# Altium PCB Morpheus_LED.PcbDoc (part 1 of 2)
Units mm, origin at the board's own origin, x right, y up, seen from the top; angles counter-clockwise.
Board outline 53.02 x 53.02 mm, 4 copper layers (Component Side, Ground Plane, Power Plane, Solder Side), stack 0.108 mm thick; 57 components, 33 nets, 170 pads, 69 vias.
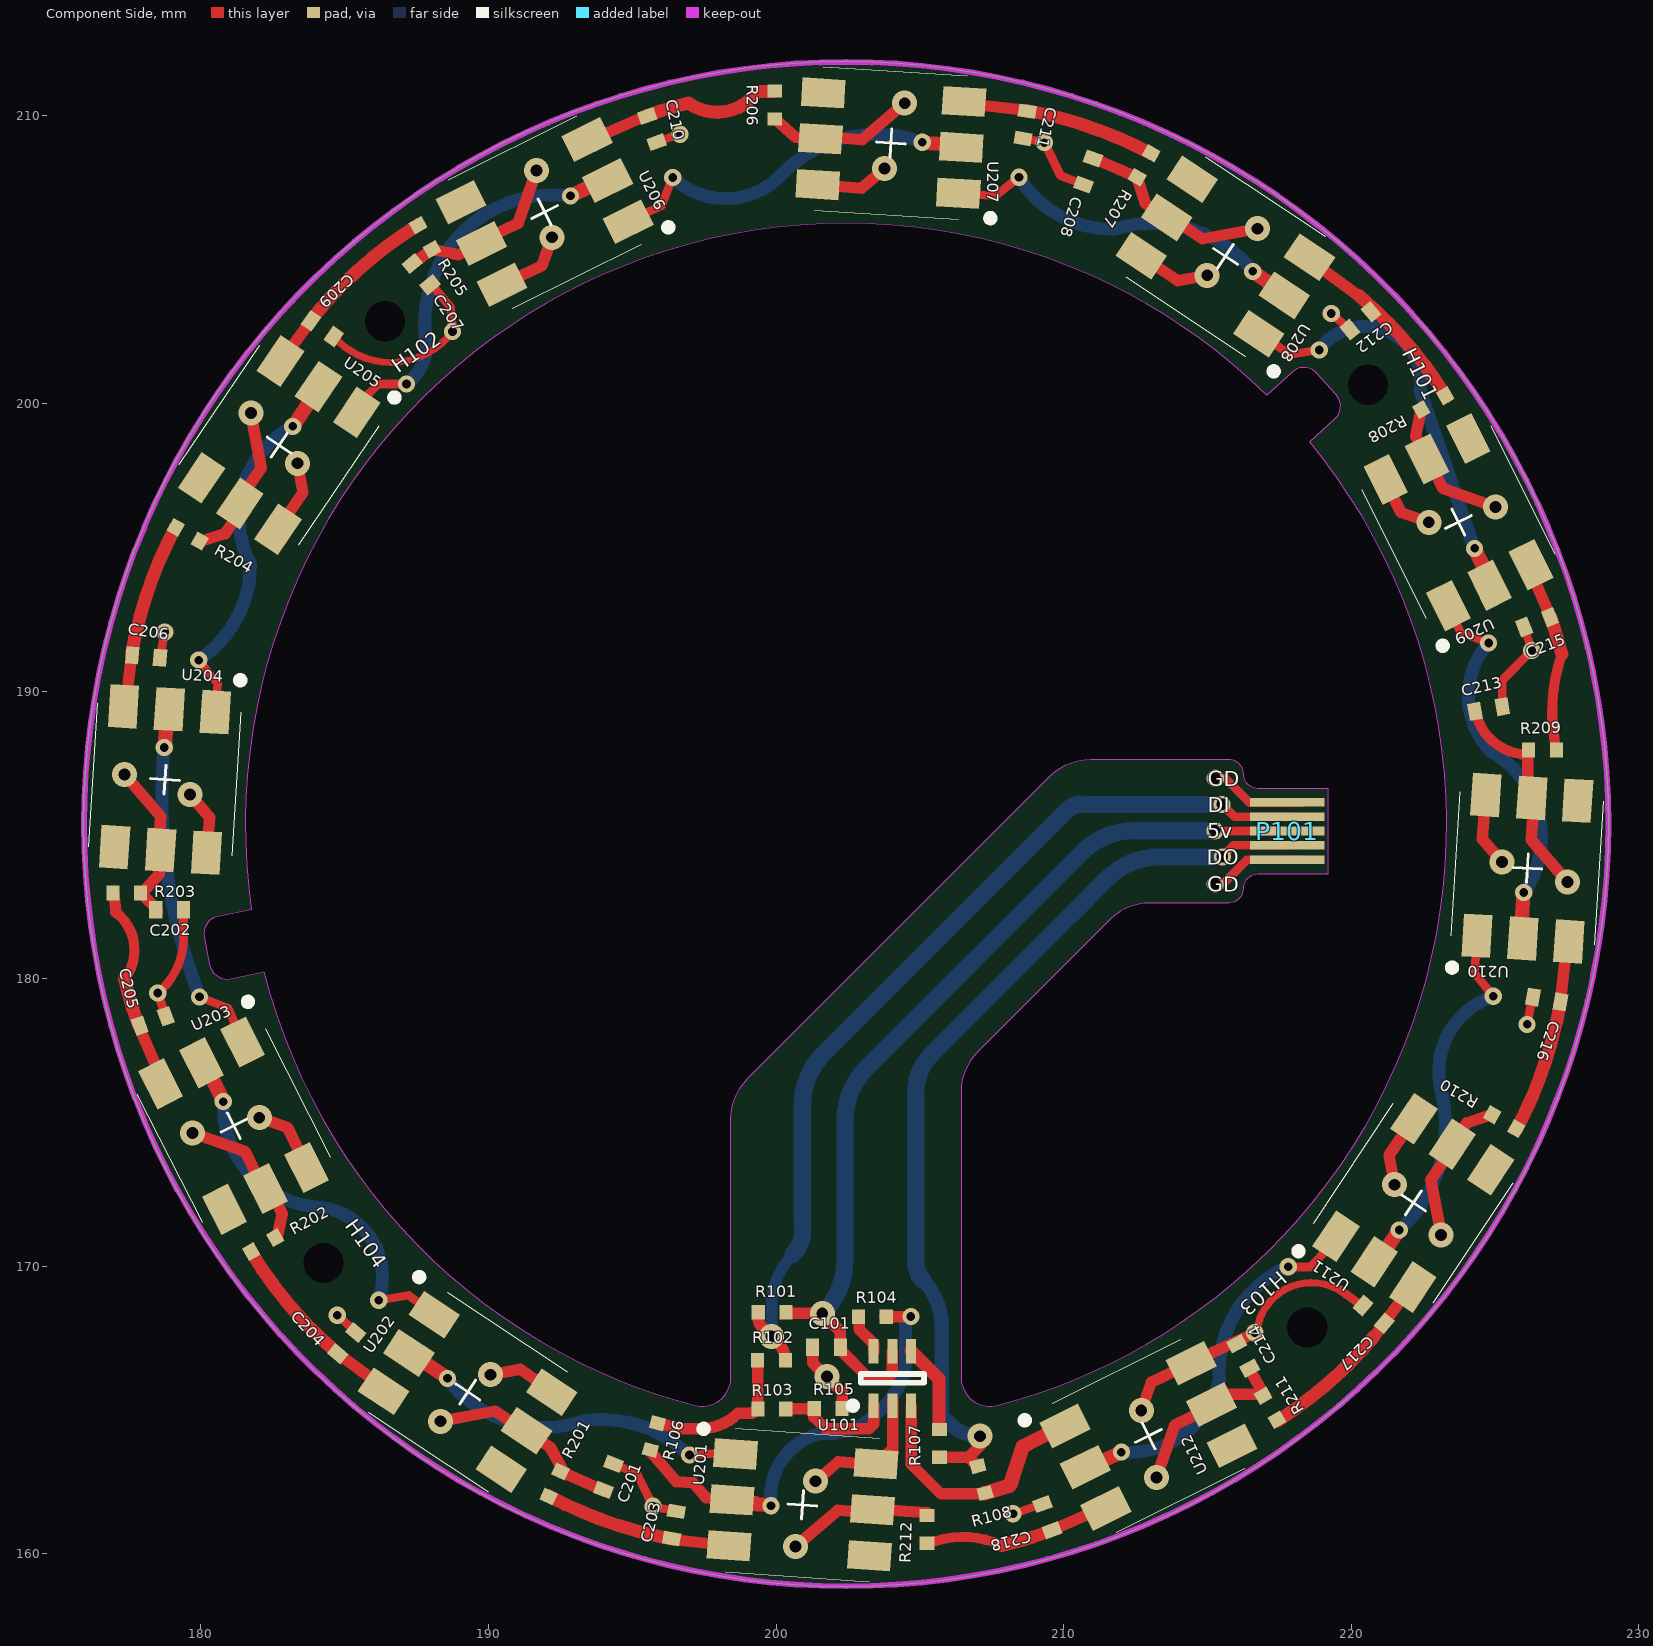
[diagram p0: Component Side view]
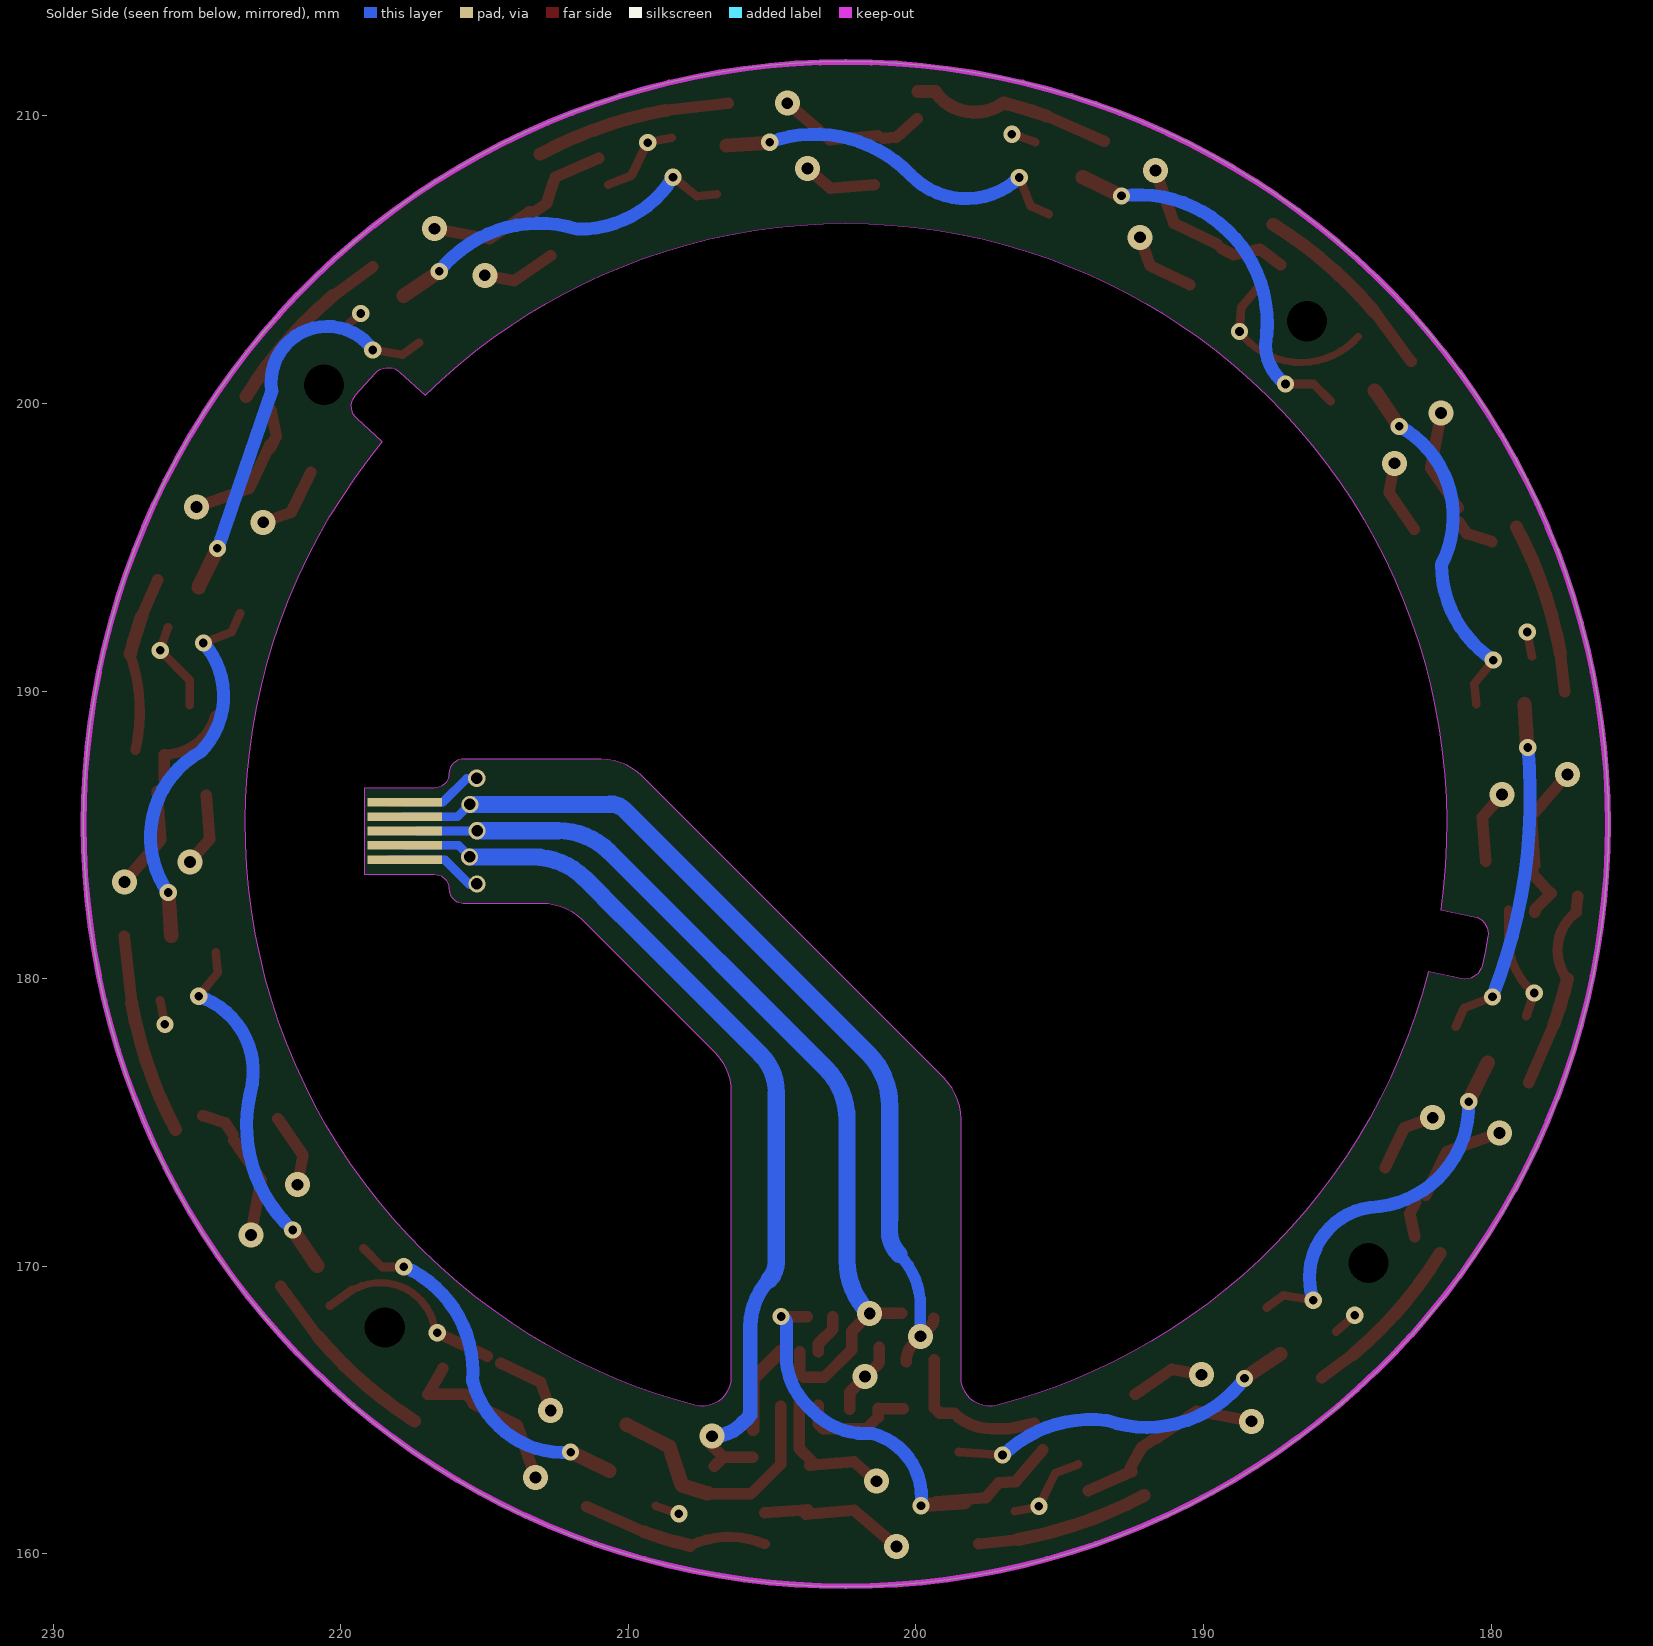
[diagram p1: Solder Side view, seen from below]
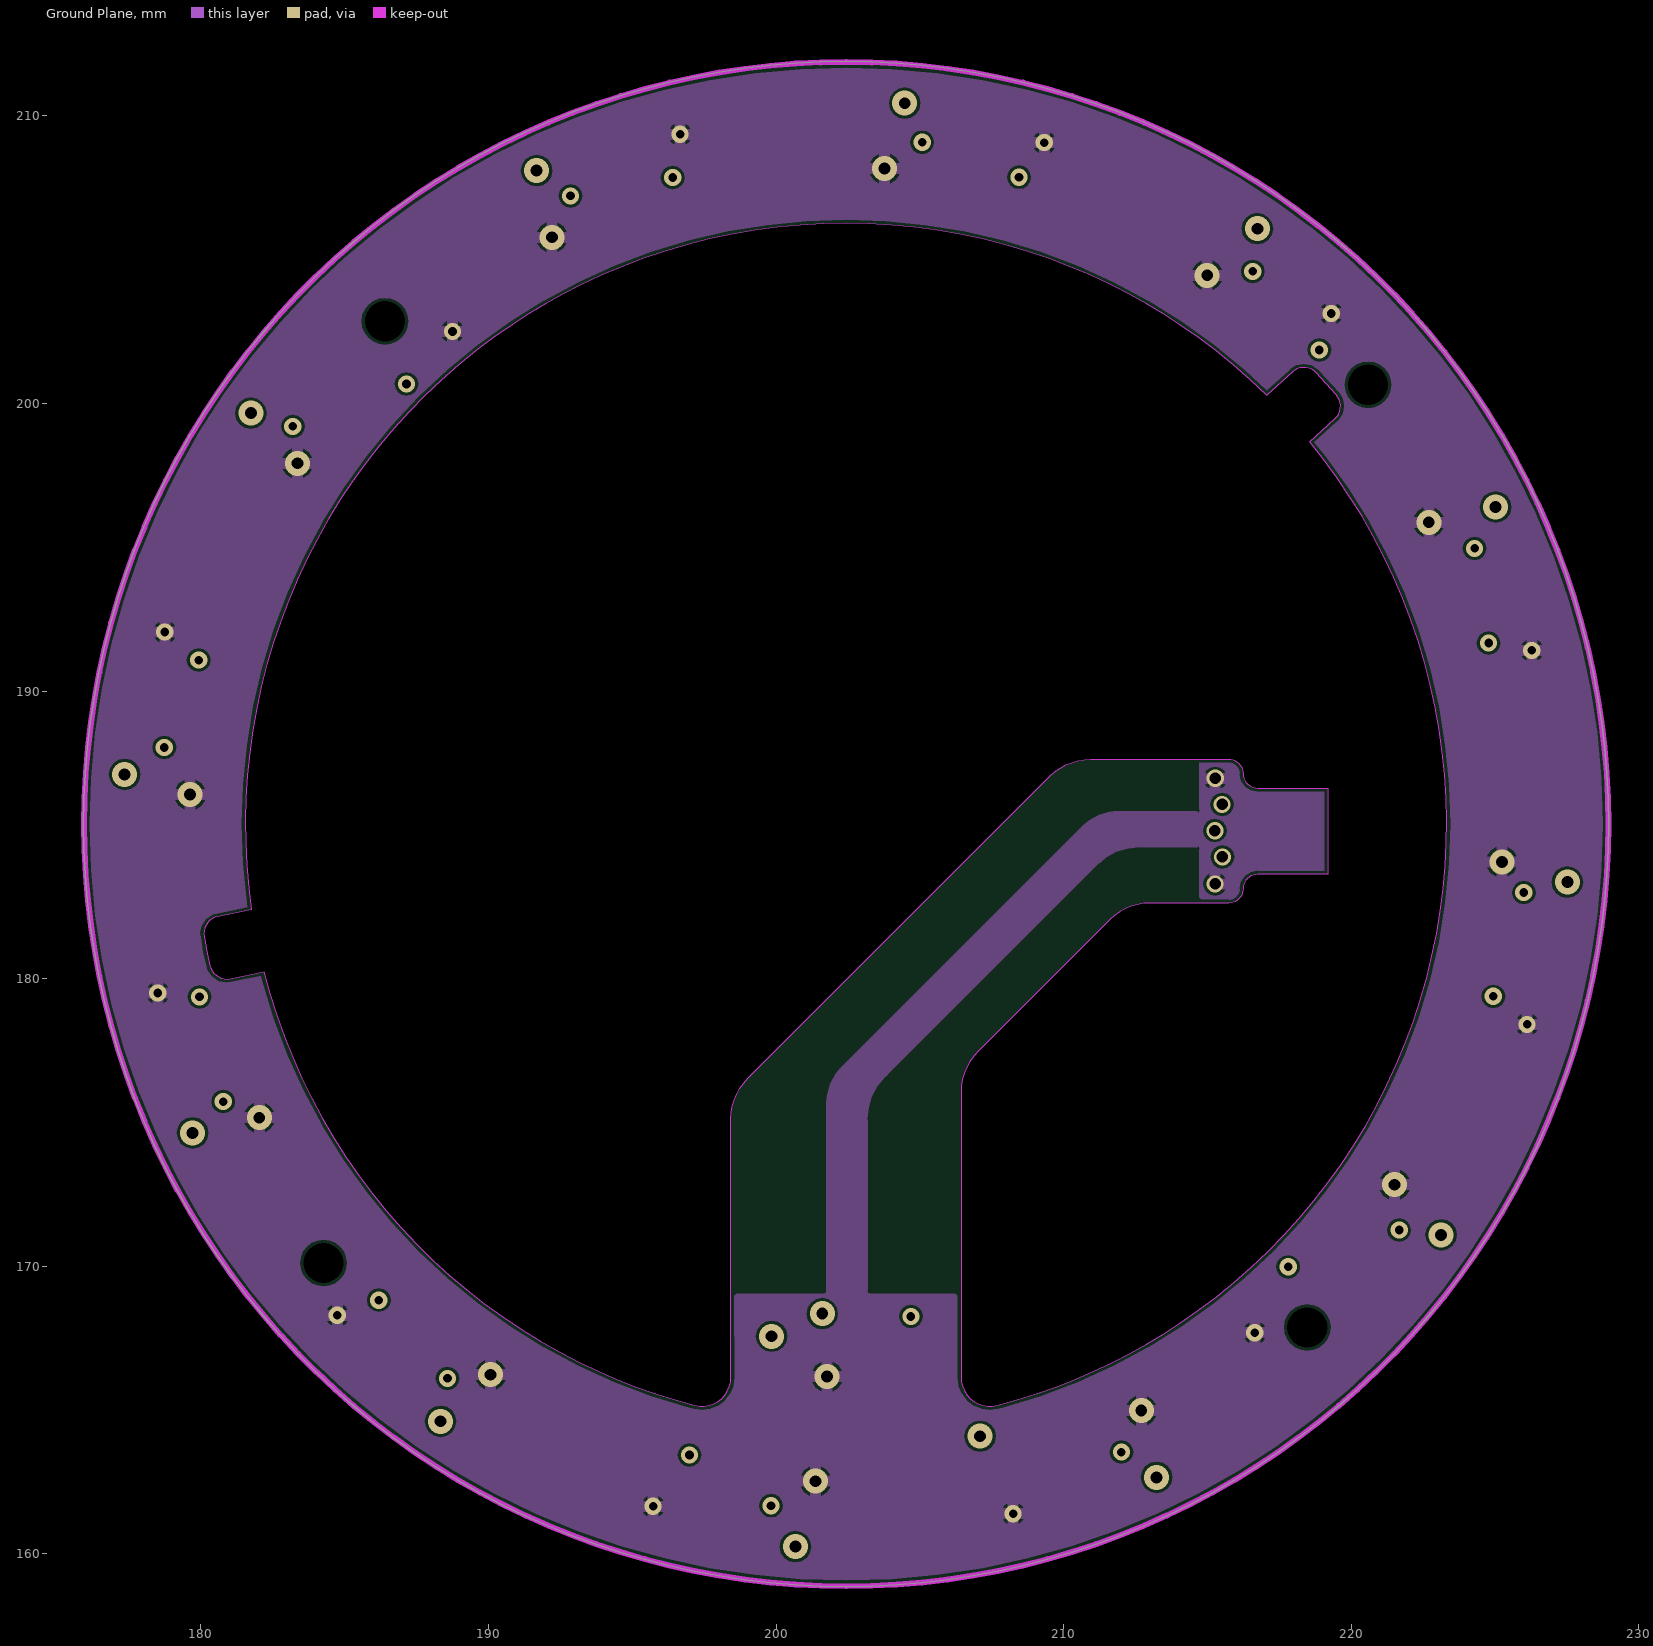
[diagram p2: Ground Plane]
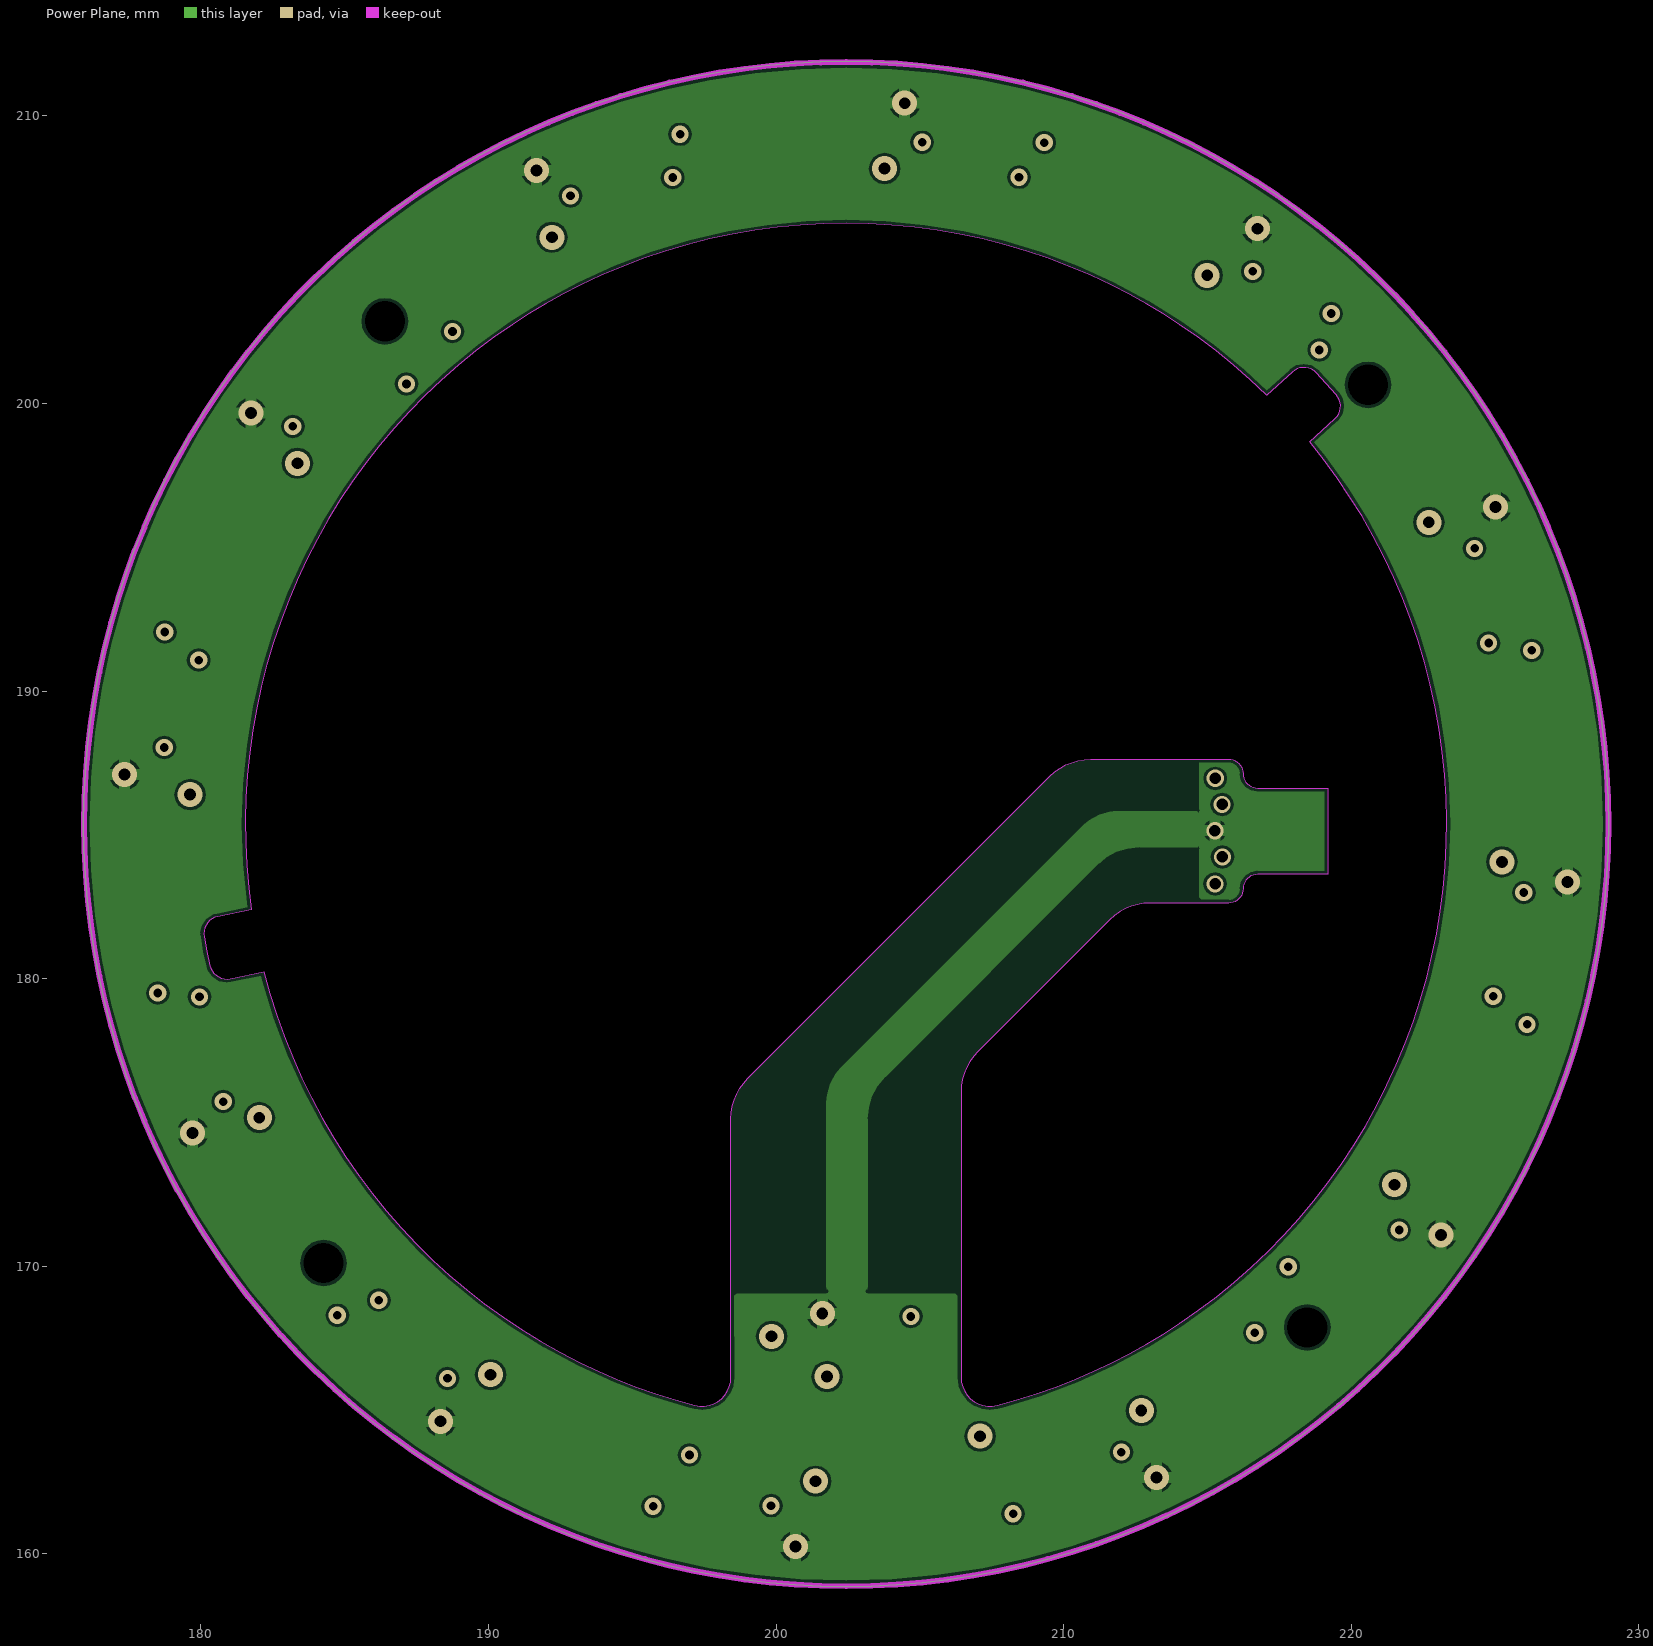
[diagram p3: Power Plane]

## Layer stack, top to bottom
Top Solder: solder mask 0.012, Solder Resist, Dk 3.5
Component Side: signal copper 0.018
Flexible Dielectric 1: surface 0.012, Polymide, Dk 3.5
Ground Plane: signal copper 0.018
Flexible core Dielectric: surface 0.012, Polymide, Dk 3.5
Power Plane: signal copper 0.018
Flexible Dielectric 2: surface 0.012, Polymide, Dk 3.5
Solder Side: signal copper 0.018
Bottom Solder: solder mask 0.012, Solder Resist, Dk 3.5

## Board outline
175.92,185.376 ccw(c202.432,185.376) 202.432,158.864 ccw(c202.432,185.376) 228.945,185.376 ccw(c202.432,185.376) 202.432,211.888 ccw(c202.432,185.376)
cut-out: 193.195,166.644 ccw(c202.432,185.376) 197.181,165.161 ccw(c197.432,166.128) 198.432,166.128 198.432,175.119 cw(c200.432,175.119) 199.018,176.533 209.525,187.04 cw(c210.939,185.626) 210.939,187.626 215.74,187.626 cw(c215.74,187.126) 216.24,187.126 ccw(c216.74,187.126) 216.74,186.626 219.19,186.626 219.19,183.626 216.74,183.626 ccw(c216.74,183.126) 216.24,183.126 cw(c215.74,183.126) 215.74,182.626 215.741,182.626 213.011,182.626 213.01,182.626 ccw(c213.01,180.626) 211.596,182.04 207.018,177.462 ccw(c208.432,176.048) 206.432,176.048 206.432,166.128 ccw(c207.432,166.128) 207.684,165.161 ccw(c202.432,185.376) 211.67,166.644 ccw(c202.432,185.376) 214.036,168.01 ccw(c202.432,185.376) 218.549,198.661 219.431,199.466 ccw(c219.026,199.91) 219.478,200.305 ccw(c202.432,185.376) 218.784,201.062 ccw(c218.351,200.647) 217.946,201.09 217.062,200.283 ccw(c202.432,185.376) 214.036,202.742 ccw(c202.432,185.376) 211.67,204.108 ccw(c202.432,185.376) 193.195,204.108 ccw(c202.432,185.376) 190.829,202.742 ccw(c202.432,185.376) 181.761,182.388 180.588,182.155 ccw(c180.705,181.567) 180.114,181.463 ccw(c202.432,185.376) 180.314,180.456 ccw(c180.9,180.586) 181.017,179.998 182.19,180.231 ccw(c202.433,185.376)
board region "Layer Stack Region 1": 206.436,211.584 207.214,211.466 208.78,211.129 210.323,210.699 211.838,210.176 213.318,209.563 214.691,208.895 214.691,187.631 206.436,187.631
board region "Layer Stack Region 1": 206.436,169.126 214.691,169.126 214.691,161.857 213.318,161.188 211.838,160.575 210.323,160.053 208.78,159.622 207.214,159.286 206.436,159.168
board region "Layer Stack Region 1": 214.691,187.631 214.691,208.895 214.759,208.862 216.154,208.075 217.5,207.205 218.79,206.255 220.021,205.229 221.188,204.131 222.286,202.965 223.312,201.734 224.261,200.443 225.131,199.098 225.918,197.702 226.62,196.262 227.233,194.781 227.756,193.267 228.186,191.723 228.522,190.157 228.763,188.573 228.849,187.631
board region "Layer Stack Region 1": 214.691,169.126 223.392,169.126 223.312,169.018 222.286,167.787 221.188,166.62 220.021,165.522 218.79,164.496 217.5,163.547 216.154,162.677 214.759,161.89 214.691,161.857
board region "Flex Stack Region": 206.436,187.631 214.691,187.631 214.691,182.627 206.436,182.627
board region "Layer Stack Region 1": 214.691,182.627 214.691,187.631 228.849,187.631 228.908,186.977 228.957,185.376 228.908,183.774 228.804,182.626
board region "Layer Stack Region 1": 198.438,187.631 176.016,187.63 176.102,188.573 176.343,190.157 176.679,191.723 177.109,193.267 177.632,194.781 178.245,196.262 178.946,197.702 179.733,199.098 180.603,200.443 181.553,201.734 182.579,202.965 183.677,204.131 184.844,205.229 186.074,206.255 187.365,207.205 188.71,208.075 190.106,208.862 191.547,209.563 193.027,210.176 194.541,210.699 196.085,211.129 197.651,211.466 198.443,211.586
board region "Layer Stack Region 1": 198.433,159.167 197.651,159.286 196.085,159.622 194.541,160.053 193.027,160.575 191.547,161.188 190.106,161.89 188.71,162.677 187.365,163.547 186.074,164.496 184.844,165.522 183.677,166.62 182.579,167.787 181.553,169.018 181.473,169.126 198.435,169.126
board region "Layer Stack Region 1": 176.061,182.629 175.957,183.774 175.908,185.376 175.957,186.977 176.016,187.631 198.438,187.631 198.437,182.628
board region "Flex Stack Region": 206.436,182.627 214.691,182.627 214.691,169.126 206.436,169.126
board region "Layer Stack Region 1": 228.804,182.626 228.763,182.179 228.522,180.595 228.186,179.028 227.756,177.485 227.233,175.97 226.62,174.49 225.918,173.049 225.131,171.654 224.261,170.308 223.392,169.126 214.691,169.126 214.691,182.627
board region "Layer Stack Region 1": 198.437,182.628 198.435,169.126 181.473,169.126 180.603,170.308 179.733,171.654 178.946,173.049 178.245,174.49 177.632,175.97 177.109,177.485 176.679,179.028 176.343,180.595 176.102,182.179 176.061,182.629
board region "Layer Stack Region 1": 206.436,187.631 198.438,187.631 198.443,211.586 199.235,211.707 200.831,211.852 202.432,211.9 204.034,211.852 205.63,211.707 206.436,211.584
board region "Layer Stack Region 1": 206.436,159.168 205.63,159.045 204.034,158.9 202.432,158.852 200.831,158.9 199.235,159.045 198.433,159.167 198.435,169.126 206.436,169.126
board region "Flex Stack Region": 206.436,182.627 198.437,182.628 198.438,187.631 206.436,187.631
board region "Flex Stack Region": 206.436,169.126 198.435,169.126 198.437,182.628 206.436,182.627

## Design rules (kind name [scope] priority, off if disabled: settings)
AssemblyTestpoint [(IsPad And (OnTopLayer Or OnBottomLayer))] p1: testpointundercomponent=FALSE minsize=0.3 maxsize=2.54 preferedsize=0.6 minholesize=0 maxholesize=1.016 preferedholesize=0 testpointgrid=0.025 usegrid=TRUE gridtolerance=0 allowsidetop=TRUE allowsidebottom=TRUE minspacing=1 compbodyclearance=1 boardedgeclearance=1
Clearance Clearance_1 [All] p1: gap=0.1
Clearance "Polygon to board edge" [All vs OnLayer('Keep-Out Layer')] p2: gap=0.5
DiffPairsRouting [All] p1: maxlimit=0.254 minlimit=0.15 mostfreqgap=0.254 toplayer_prefgap=0.15 toplayer_minwidth=0.15 toplayer_maxwidth=0.381 toplayer_prefwidth=0.15 midlayer1_minwidth=0.15 midlayer1_maxwidth=0.381 midlayer1_prefwidth=0.381 midlayer2_minwidth=0.15 midlayer2_maxwidth=0.381 midlayer2_prefwidth=0.381 bottomlayer_prefgap=0.15 bottomlayer_minwidth=0.15 bottomlayer_maxwidth=0.381 bottomlayer_prefwidth=0.15 maxuncoupledlength=12.7
FabricationTestpoint [(IsPad And (OnTopLayer Or OnBottomLayer))] p1: side=3 testpointundercomponent=TRUE minsize=0.3 maxsize=2.54 preferedsize=0.6 minholesize=0 maxholesize=1.016 preferedholesize=0 testpointgrid=0.025 allowsidetop=TRUE allowsidebottom=TRUE usegrid=TRUE gridtolerance=0 minspacing=1 compbodyclearance=1 boardedgeclearance=1
FanoutControl Fanout_Default [All] p5: bgadir=Out bgaviamode=Centered fanoutstyle=Staggered fanoutdirection=Alternating viagrid=0.025 // Fanout_Default (Default Rule)
HoleSize [All] p1 off: absolutevalues=TRUE maxlimit=5 minlimit=0.35 maxpercent=80.000 minpercent=20.000
MinimumSolderMaskSliver [All] p1 off: minsoldermaskwidth=0.2
PasteMaskExpansion [All] p1: expansion=-0.05
PolygonConnect "Polygon Connect Net Tie" [(InComponentClass('Net Tie'))] p1: connectstyle=Direct reliefconductorwidth=0.254 reliefentries=4 polygonreliefangle="90 Angle" airgapwidth=0.254
PolygonConnect [All] p2: connectstyle=Relief reliefconductorwidth=0.4 reliefentries=4 polygonreliefangle="90 Angle" airgapwidth=0.1
RoutingCorners [All] p1: cornerstyle=45-Degree minsetback=1 maxsetback=5
RoutingVias "Power VIas" [InNetClass('Power')] p1: holewidth=0.2 width=0.4 viastyle="Through Hole" minholewidth=0.2 minwidth=0.4 maxholewidth=1 maxwidth=1
RoutingVias [All] p2: holewidth=0.2 width=0.4 viastyle="Through Hole" minholewidth=0.2 minwidth=0.4 maxholewidth=1 maxwidth=1
ShortCircuit "ShortCircuit between AGND and GND" [(InNet('GND')) vs (InNet('AGND'))] p1: allowed=TRUE
ShortCircuit [All] p2: allowed=FALSE
SilkToSolderMaskClearance [IsPad] p1 off: minsilkscreentomaskgap=0 clearancetoexposedcopper=TRUE
SolderMaskExpansion [All] p1: expansion=0.07
Width "Power width" [InNetClass('Power')] p1: maxlimit=2 minlimit=0.2 preferedwidth=1
Width LED [InNetClass('LED')] p2: maxlimit=0.15 minlimit=0.15 preferedwidth=0.15
Width TP [InNetClass('TP')] p3: maxlimit=0.15 minlimit=0.15 preferedwidth=0.15
Width [All] p4: maxlimit=2 minlimit=0.15 preferedwidth=0.15
20 further rules are at their usual default settings.

## Classes and differential pairs
component class Morpheus_LED2: C201 C202 C203 C204 C205 C206 C207 C208 C209 C210 C211 C212 C213 C214 C215 C216 C217 C218 R201 R202 R203 R204 R205 R206 R207 R208 R209 R210 R211 R212 U201 U202 U203 U204 U205 U206 U207 U208 U209 U210 U211 U212
differential pair class COMM_LINES: COMM
component class Morpheus_LED1: C101 H101 H102 H103 H104 P101 R101 R102 R103 R104 R105 R106 R107 R108 U101

## Components (designator, comment, footprint, x,y, rotation, side; value= is the part's Value field where it differs from the comment)
C101 "DNP" CAP0402_SENSE_DVT 201.754,167.178 r180 top
C201 "4.7u" CAP0402_SENSE_DVT 194.175,162.675 r249 top
C202 "4.7u" CAP0402_SENSE_DVT 178.917,182.398 r180 top
C203 "0.1u" CAP0402_SENSE_DVT 196.453,161.005 r260 top
C204 "0.1u" CAP0402_SENSE_DVT 185.075,167.325 r230 top
C205 "0.1u" CAP0402_SENSE_DVT 178.325,178.525 r200 top
C206 "0.1u" CAP0402_SENSE_DVT 178.1,191.2 r175 top
C207 "4.7u" CAP0402_SENSE_DVT 187.66,204.496 r130 top
C208 "4.7u" CAP0402_SENSE_DVT 210.856,208.062 r70 top
C209 "0.1u" CAP0402_SENSE_DVT 184.225,202.6 r145 top
C210 "0.1u" CAP0402_SENSE_DVT 195.69,209.539 r110 top
C211 "0.1u" CAP0402_SENSE_DVT 208.664,209.685 r81 top
C212 "0.1u" CAP0402_SENSE_DVT 220.32,202.877 r40 top
C213 "4.7u" CAP0402_SENSE_DVT 224.775,189.375 r190 top
C214 "4.7u" CAP0402_SENSE_DVT 216.24,166.883 r298 top
C215 "0.1u" CAP0402_SENSE_DVT 226.458,192.393 r21 top
C216 "0.1u" CAP0402_SENSE_DVT 226.8,179.275 r350 top
C217 "0.1u" CAP0402_SENSE_DVT 220.775,168.325 r320 top
C218 "0.1u" CAP0402_SENSE_DVT 209.425,161.275 r290 top
H101 "DNP" HOLE_ROUND_1.4mm 220.584,200.645 r90 top
H102 "DNP" HOLE_ROUND_1.4mm 186.401,202.853 r90 top
H103 "DNP" HOLE_ROUND_1.4mm 218.473,167.87 r90 top
H104 "DNP" HOLE_ROUND_1.4mm 184.266,170.111 r90 top
P101 "DNP" mate_for_molex_51281-0594 216.2,181.406 r180 top
R101 "1.5k" RES0402_SENSE_DVT 199.867,168.399 r0 top
R102 "475" RES0402_SENSE_DVT 199.844,166.737 r0 top
R103 "DNP" RES0402_SENSE_DVT 199.856,165.035 r0 top
R104 "DNP" RES0402_SENSE_DVT 203.351,168.24 r0 top
R105 "DNP" RES0402_SENSE_DVT 201.811,165.054 r180 top
R106 "0" RES0402_SENSE_DVT 195.755,164.075 r255 top
R107 "DNP" RES0402_SENSE_DVT 205.683,163.842 r270 top
R108 "0" RES0402_SENSE_DVT 207.143,162.582 r105 top
R201 "150" RES0402_SENSE_DVT 192.3,162.425 r65 top
R202 "150" RES0402_SENSE_DVT 182.175,170.75 r30 top
R203 "150" RES0402_SENSE_DVT 177.425,182.975 r0 top
R204 "150" RES0402_SENSE_DVT 179.55,195.45 r330 top
R205 "150" RES0402_SENSE_DVT 187.8,205.775 r300 top
R206 "150" RES0402_SENSE_DVT 199.95,210.375 r270 top
R207 "150" RES0402_SENSE_DVT 212.8,208.275 r240 top
R208 "150" RES0402_SENSE_DVT 222.85,200.025 r210 top
R209 "150" RES0402_SENSE_DVT 226.65,187.95 r180 top
R210 "150" RES0402_SENSE_DVT 225.325,175.025 r150 top
R211 "150" RES0402_SENSE_DVT 217.175,165.075 r120 top
R212 "150" RES0402_SENSE_DVT 205.25,160.85 r90 top
U101 "DNP" SOT65P210X110-6N 204.046,166.1 r90 top
U201 "WS2812S" 6PIN_WS2812 200.916,161.704 r176 top
U202 "WS2812S" 6PIN_WS2812 189.28,165.631 r146.5 top
U203 "WS2812S" 6PIN_WS2812 181.143,174.887 r117 top
U204 "WS2812S" 6PIN_WS2812 178.754,186.92 r86.4 top
U205 "WS2812S" 6PIN_WS2812 182.725,198.55 r56 top
U206 "WS2812S" 6PIN_WS2812 191.953,206.653 r26.5 top
U207 "WS2812S" 6PIN_WS2812 203.993,209.052 r356.5 top
U208 "WS2812S" 6PIN_WS2812 215.624,205.109 r326.4 top
U209 "WS2812S" 6PIN_WS2812 223.722,195.874 r296.4 top
U210 "WS2812S" 6PIN_WS2812 226.123,183.837 r266.4 top
U211 "WS2812S" 6PIN_WS2812 222.159,172.201 r236.4 top
U212 "WS2812S" 6PIN_WS2812 212.949,164.103 r206.4 top

## Footprints (in the part's own frame and the unit in brackets; to place one, negate y for a bottom-side part, rotate by r counter-clockwise, add the part's x,y. Pads: shape width x height; smd on the part's side, far side on the other; paste and mask are expansions set on the pad)
6PIN_WS2812 [mm] "6-pin 5.4 x 5.4 x 1.5mm"
  rect 1.5x1 smd: 1(2.45,-1.6) 2(2.45,0) 3(2.45,1.6) 4(-2.45,1.6) 5(-2.45,0) 6(-2.45,-1.6)
  silkscreen extent -2.5,-2.52 3.74,2.5, body extent -2.51,-2.51 2.5,2.52, height 0.8
CAP0402_SENSE_DVT [mil] "Chip Capacitor, 2-Leads"
  rect 18x24 smd: 1(-19,0) 2(19,0)
  body extent -21,-11 21,11, height 22
HOLE_ROUND_1.4mm [mm]
  round 1.2 hole 1.4 unplated: 1(0,0)
mate_for_molex_51281-0594 [mm] "Mate for Molex 5-pin connector pads"
  rect 2.6x0.3 smd far side mask+0.05: 1(-1.575,-2.725) 2(-1.575,-3.225) 3(-1.575,-3.725) 4(-1.575,-4.225) 5(-1.575,-4.725)
  rect 2.6x0.3 smd mask+0.05: 1_t(-1.575,-2.725) 2_t(-1.575,-3.225) 3_t(-1.575,-3.725) 4_t(-1.575,-4.225) 5_t(-1.575,-4.725)
RES0402_SENSE_DVT [mil] "Chip resistor 0402"
  rect 18x20 smd: 1(-19,0) 2(19,0)
  body extent -24,-8 24,8, height 20
SOT65P210X110-6N [mm] "SOT23, 6-Leads, Body 2.00x2.10mm, Pitch 0.65mm, IPC Medium Density"
  rect 0.85x0.35 smd: 1(-0.95,0.65) 2(-0.95,0) 3(-0.95,-0.65) 4(0.95,-0.65) 5(0.95,0) 6(0.95,0.65)
  silkscreen extent -1.07,-1.1 0.15,1.5, body extent -0.68,-1.1 0.67,1.1, height 1.1

## Part data
C101 C203 C204 C205 C206 C209 C210 C211 C212 C215 C216 C217 C218: library part C_0.1u_10_50_X7R_0402, "Chip capacitor"
C201 C202 C207 C208 C213 C214: library part C_4.7u_10_10_JB_0402, "Chip capacitor"
H101 H102 H103 H104: library part Hole, "general purpose hole"
P101: library part mate_for_molex_51281-0594, "Molex 5-pin flex connector 0.3mm working height"
R101 R105: library part R_1.5k_5_0.1_0402, "Chip Resistor"
R102: library part R_475_1_0.1_0402, "Chip Resistor"
R103 R106 R108: library part R_0_jumper_0.1_0402, "Chip Resistor"
R104 R107: library part R_100_1_0.1_0402, "Chip Resistor"
R201 R202 R203 R204 R205 R206 R207 R208 R209 R210 R211 R212: library part R_150_1_0.1_0402, "Chip Resistor"
U101: library part 74HCT2G04, "Dual inverter The 74HC2G04; 74HCT2G04 is a high-speed Si-gate CMOS device."
U201 U202 U203 U204 U205 U206 U207 U208 U209 U210 U211 U212: "WS2812S Intelligent control LED integrated light source"

## Via types
v1: diameter 0.6, hole 0.3, Component Side to Solder Side, tented both sides, 36 vias
v2: diameter 0.87, hole 0.411, Component Side to Solder Side, tented both sides, 28 vias
v3: diameter 0.6, hole 0.4, Component Side to Solder Side, tented both sides, 5 vias

## Nets (pads, with @x,y where several pads share a name; then routed paths per layer and width w, separated by ;. In a path a pad name is that pad's centre, name@x,y a point inside that pad or via, vN(x,y) a via of type N, cw(c..) or ccw(c..) an arc to the next point about the centre after c; other vN are vias at no path point)
1Y: R104.1 U101.6 | length 1.4
  Component Side w0.4: R104.1@202.885,168.24 202.885,167.813 203.396,167.302 U101.6@203.396,167.025
2Y: R107.1 U101.4 | length 3.1
  Component Side w0.454: U101.4@204.696,167.05 205.662,166.084 R107.1@205.662,164.332
5V: C101.1 C201.2 C202.2 C207.2 C208.2 C213.2 C214.2 P101.3 P101.3_t R101.2 R201.2 R202.2 R203.2 R204.2 R205.2 R206.2 R207.2 R208.2 R209.2 R210.2 R211.2 R212.2 U101.5 U201.5 U202.5 U203.5 U204.5 U205.5 U206.5 U207.5 U208.5 U209.5 U210.5 U211.5 U212.5 | length 103.6
  Component Side w0.3: v3@215.221,185.131 P101.3_t@217.339,185.131
  Component Side w0.354: C213.2@224.358,189.152 ccw(c226.15,189.65) R209.2@226.143,187.79
  Component Side w0.4: v2(177.35,187.1) 178.614,185.623 U204.5@178.484,183.95 ; R203.2@177.908,182.975 178.421,182.461 cw(c178.274,182.314) C202.2@178.482,182.314 ; R203.2@177.95,182.962 178.557,183.636 ; 178.555,183.636 U204.5@178.587,184.102 ; v2(179.713,174.633) 181.546,173.987 U203.5@182.271,172.473 ; R204.2@179.974,195.19 180.85,195.475 ; 180.848,195.476 U205.5@181.112,195.867 ; U205.5@181.147,196.366 182.096,197.75 v2(181.739,199.661) ; U203.5@182.624,172.244 182.829,171.824 ; R202.2@182.661,171.028 182.831,171.825 ; C207.2@187.325,204.825 R205.2@188.041,205.357 ; R205.2@188.16,205.333 188.958,205.164 ; v2(188.334,164.607) 190.244,164.963 U202.5@191.629,164.014 ; 188.957,205.166 U206.5@189.376,205.371 ; U206.5@189.516,205.538 191.03,206.262 v2(191.677,208.095) ; U202.5@191.762,163.959 192.15,163.7 192.552,162.974 R201.2@192.5,162.871 ; R201.2@192.504,162.862 C201.2@194.018,162.198 ; R206.2@199.958,209.901 200.68,209.251 ; R101.2@200.503,168.357 201.615,168.357 202.233,167.74 202.233,167.098 203.199,166.132 203.902,166.132 204.046,166.275 U101.5@204.046,167.025 ; v2(200.675,160.25) 202.152,161.514 U201.5@203.825,161.384 ; 200.68,209.254 U207.5@201.145,209.221 ; U207.5@201.325,209.305 202.998,209.175 v2(204.474,210.439) ; U201.5@203.761,161.532 R212.2@205.257,161.427 ; C208.2@211.033,208.521 R207.2@212.547,207.856 ; R207.2@212.597,207.714 212.849,206.939 ; 212.851,206.941 U208.5@213.238,206.68 ; v2(213.23,162.658) 213.876,164.491 U212.5@215.39,165.215 ; U208.5@213.439,206.667 214.824,205.718 v2(216.734,206.074) ; U212.5@215.487,165.381 215.657,165.55 R211.2@216.909,165.55 ; C214.2@216.449,166.447 R211.2@216.971,165.543 ; 222.237,198.856 R208.2@222.435,199.783 ; 222.24,198.857 U209.5@222.444,198.437 ; U209.5@222.46,198.558 223.184,197.044 v2(225.017,196.398) ; v2(223.124,171.091) 222.768,173.001 U211.5@223.717,174.386 ; U211.5@223.755,174.594 224.016,174.981 ; 224.014,174.983 R210.2@224.79,175.235 ; U210.5@226.143,186.929 R209.2@226.143,187.79 ; U210.5@226.38,186.508 226.25,184.834 v2(227.514,183.358)
  Solder Side w0.3: v3@215.216,185.131 P101.3@217.334,185.131
  Solder Side w0.4: v2(201.608,168.352) v2@201.652,168.395 ; 202.396,170.191 202.396,171.597
  Solder Side w0.6: v2@201.652,168.395 ccw(c199.856,170.191) 202.396,170.191 ; 202.397,170.305 202.397,175.093 cw(c204.937,175.093) 203.141,176.889 210.654,184.401 cw(c212.45,182.605) 212.45,185.145 v3(215.259,185.145)
DI_201: R104.2 R106.2 U201.2 | length 16.1
  Component Side w0.4: R106.2@195.588,163.613 196.53,162.512 197.122,162.467 197.568,161.946 199.288,161.812 ; R104.2@203.785,168.248 v1@204.715,168.248
  Component Side w0.5: U201.2@198.325,161.785 v1@199.827,161.685
  Solder Side w0.454: v1@199.824,161.679 cw(c202.096,161.968) 201.504,164.18 201.757,164.18 ccw(c201.757,166.72) 203.553,164.924 203.793,165.163 ccw(c202.064,166.891) 204.509,166.891 204.509,168.039 cw(c204.684,168.039) v1@204.684,168.214
  other v1: 199.826,161.674 204.69,168.253
DI_N: R103.2 R105.2 U101.1 | length 4.2
  Component Side w0.4: R103.2@200.433,165.041 R105.2@201.274,165.041 ; R105.2@201.319,165.066 201.319,164.757 201.735,164.341 202.687,164.341 ; 202.651,164.343 203.226,164.343 203.398,164.515 U101.1@203.398,165.161
DO_201: U201.1 U202.2 | length 12.3
  Component Side w0.3: v1@196.965,163.434 U201.1@198.505,163.541
  Component Side w0.5: U202.2@187.331,166.946 v1@188.581,166.109
  Solder Side w0.454: v1@188.572,166.103 ccw(c191.968,168.635) 193.373,164.639 ; 193.373,164.639 cw(c193.915,160.289) v1@196.962,163.44
  other v1: 196.99,163.436 188.575,166.1
DO_202: U202.1 U203.2 | length 13.3
  Component Side w0.3: v1@186.188,168.818 187.232,168.983 U202.1@187.805,168.567 ; U202.1@187.725,168.622 U202.1@187.796,168.57
  Component Side w0.5: U203.2@180.125,177.078 v1@180.789,175.728
  Solder Side w0.3: v1@180.75,175.75 v1@180.774,175.719
  Solder Side w0.454: v1@180.783,175.716 ccw(c184.33,175.594) 184.209,172.047 cw(c183.86,169.613) v1(186.187,168.821)
  other v1: 180.78,175.723
DO_203: U203.1 U204.2 | length 12.1
  Component Side w0.3: v1@179.955,179.36 180.942,178.981 U203.1@181.23,178.334
  Component Side w0.5: v1@178.741,188.036 U204.2@178.84,189.538
  Solder Side w0.454: v1@178.722,188.038 ccw(c197.574,186.304) v1@179.953,179.381
  other v1: 179.956,179.363 178.73,188.037
DO_204: U204.1 U205.2 | length 12.8
  Component Side w0.3: v1@179.922,191.073 180.587,190.251 U204.1@180.513,189.547
  Component Side w0.5: v1@183.209,199.194 U205.2@184.046,200.444
  Solder Side w0.454: v1(179.925,191.075) ccw(c177.712,194.428) 181.729,194.401 cw(c184.892,196.061) v1@183.194,199.203
  other v1: 183.2,199.2
DO_205: U205.1 U206.2 | length 13.3
  Component Side w0.3: U205.1@185.577,200.073 186.179,200.675 v1(187.15,200.675)
  Component Side w0.5: v1@192.86,207.205 U206.2@194.21,207.869
  Solder Side w0.454: v1(187.15,200.675) ccw(c186.148,202.051) 187.85,202.025 cw(c192.257,202.783) v1(192.856,207.215)
DO_206: U206.1 U207.2 | length 12.8
  Component Side w0.3: U206.1@195.377,206.579 196.024,206.867 v1@196.403,207.854
  Component Side w0.5: v1@205.08,209.068 U207.2@206.581,208.968
  Solder Side w0.454: v1(196.407,207.853) ccw(c198.247,209.802) 200.189,207.953 cw(c203.51,204.738) v1@205.08,209.086
  other v1: 205.081,209.079
DO_207: U207.1 U208.2 | length 12.6
  Component Side w0.3: U207.1@206.921,207.275 207.626,207.201 v1@208.447,207.867
  Component Side w0.5: v1@216.568,204.58 U208.2@217.819,203.743
  Solder Side w0.454: v1(208.449,207.864) ccw(c211.677,209.845) 211.776,206.06 cw(c213.106,201.818) v1@216.577,204.595
  other v1: 216.574,204.589
DO_208: U208.1 U209.2 | length 14.2
  Component Side w0.3: U208.1@217.272,202.111 217.845,201.695 v1@218.889,201.861
  Component Side w0.5: v1@224.279,194.954 U209.2@224.943,193.603
  Solder Side w0.454: v1@218.885,201.861 cw(c220.472,200.728) 222.405,200.472 ; 222.4,200.425 ccw(c1474.393,627.946) v1@224.283,194.95
  other v1: 224.288,194.958 218.889,201.857
DO_209: U209.1 U210.2 | length 13.1
  Component Side w0.3: U209.1@223.501,192.697 223.789,192.05 v1@224.776,191.671
  Component Side w0.5: U210.2@225.89,181.493 v1@225.99,182.994
  Solder Side w0.454: v1(224.774,191.668) ccw(c226.832,189.83) 224.875,187.885 cw(c223.226,184.927) v1@226.007,182.995
  other v1: 226.001,182.994
DO_210: U210.1 U211.2 | length 12.7
  Component Side w0.3: U210.1@224.351,180.911 224.277,180.207 v1@224.942,179.385
  Component Side w0.5: U211.2@220.818,170.013 v1@221.655,171.264
  Solder Side w0.454: v1@221.671,171.255 ccw(c218.309,174.904) 223.135,176.056 cw(c225.802,176.762) v1(224.939,179.383)
  other v1: 221.664,171.258
DO_211: U211.1 U212.2 | length 12.8
  Component Side w0.3: v1@217.794,169.971 218.561,169.971 219.211,170.621 U211.1@219.161,170.553
  Component Side w0.5: U212.2@210.653,162.882 210.787,162.948 v1@212.003,163.546
  Solder Side w0.454: v1@211.993,163.541 v1@212.003,163.546 ; v1@211.999,163.525 ccw(c212.232,166.787) 215.41,166.013 ; 215.421,166.013 cw(c219.393,166.329) v1@217.751,169.96
  other v1: 212.008,163.537 217.807,169.978
DO_212: R108.1 U101.3 U212.1 | length 9.1
  Component Side w0.4: U101.3@204.696,165.125 204.696,163.123 205.737,162.081 R108.1@207.32,162.081
  Component Side w0.5: R108.1@207.237,162.101 208.136,162.376 208.577,163.733 U212.1@210.055,164.487
GND: C101.2 C201.1 C202.1 C203.1 C204.1 C205.1 C206.1 C207.1 C208.1 C209.1 C210.1 C211.1 C212.1 C213.1 C214.1 C215.1 C216.1 C217.1 C218.1 P101.1 P101.1_t P101.5 P101.5_t R105.1 U101.2 U201.6 U202.6 U203.6 U204.6 U205.6 U206.6 U207.6 U208.6 U209.6 U210.6 U211.6 U212.6 | length 80.7
  Component Side w0.254: C209.1@184.62,202.323 ccw(c186.614,204.082) v1(188.75,202.5) ; v1@216.717,167.727 cw(c218.622,167.511) 219.86,168.974
  Component Side w0.3: v1@178.501,179.497 C205.1@178.778,178.69 ; C206.1@178.581,191.214 v1@178.744,192.051 ; v1@178.656,179.623 ccw(c176.86,181.419) 179.4,181.419 C202.1@179.4,182.398 ; v1@184.743,168.29 C204.1@185.387,167.73 ; C207.1@188.008,204.154 188.685,203.347 v1(188.75,202.5) ; C201.1@194.36,163.111 195.157,162.805 195.722,161.648 195.724,161.644 C203.1@196.561,161.481 ; C210.1@195.855,209.086 v1@196.661,209.364 ; v1@208.245,161.39 C218.1@209.052,161.668 ; C211.1@208.489,209.238 v1@209.327,209.075 ; v1@209.329,209.07 209.894,207.914 C208.1@210.691,207.608 ; v3@215.253,183.264 v3@215.509,183.264 ; v3@215.263,186.96 215.625,186.96 216.46,186.125 P101.5_t@218.269,186.125 ; v3@215.514,183.264 v3@215.509,183.264 ; 216.376,184.131 v3@215.509,183.264 ; 216.381,184.131 P101.1_t@218.31,184.131 ; v1@219.306,203.127 C212.1@219.95,202.567 ; 219.616,169.178 C217.1@220.386,168.619 ; C213.1@225.25,189.502 225.25,190.378 226.285,191.413 C215.1@226.008,192.22 ; v1@226.12,178.406 C216.1@226.283,179.244
  Component Side w0.4: v2(179.625,186.4) 180.303,185.608 U204.6@180.184,184.075 ; v2(182.034,175.165) 183.017,174.818 U203.6@183.68,173.431 ; U205.6@182.681,195.624 183.551,196.892 v2(183.36,197.917) ; v2(190.077,166.227) 191.102,166.418 U202.6@192.37,165.549 ; U206.6@190.474,204.128 191.861,204.791 v2(192.208,205.775) ; C101.2@201.271,167.178 201.271,166.646 202.303,165.615 R105.1@202.303,165.035 ; v2(201.375,162.525) 202.167,163.203 U201.6@203.7,163.084 ; U207.6@201.45,207.605 202.982,207.486 v2(203.774,208.164) ; U201.6@203.627,163.225 204.054,163.653 U101.2@204.054,165.358 ; v2(212.698,164.978) 213.045,165.962 U212.6@214.432,166.625 ; U208.6@212.698,205.132 213.966,204.263 v2(214.991,204.454) ; U212.6@214.9,166.875 v1@216.647,167.69 ; U209.6@221.05,197.6 221.713,196.213 v2(222.697,195.866) ; v2(221.504,172.834) 221.313,173.859 U211.6@222.182,175.127 ; U210.6@224.68,186.383 224.561,184.85 v2(225.239,184.058)
  Solder Side w0.3: v3@215.248,183.264 v3@215.509,183.264 ; v3@215.258,186.96 215.62,186.96 216.451,186.129 P101.5@217.76,186.129 ; v3@215.514,183.264 216.381,184.131 ; 216.376,184.131 P101.1@218.305,184.131
  other v1: 208.243,161.396 195.725,161.65 216.648,167.687 184.747,168.294 226.114,178.408 178.507,179.499 226.28,191.411 178.75,192.05 219.3,203.125 209.326,209.069 196.663,209.358
  other v2: 201.772,166.163
  other v3: 215.264,183.292 215.271,186.963
INNER: R102.1 R103.1 R106.1 | length 5.4
  Component Side w0.4: R106.1@195.88,164.541 196.768,164.348 197.365,164.348 ccw(c197.365,166.204) 198.677,164.892 199.17,164.892 199.358,165.08 R102.1@199.358,166.743
LED_RING_DI: P101.4 P101.4_t R101.1 R102.2 | length 34.7
  Component Side w0.3: v3@215.51,186.06 215.939,185.631 P101.4_t@217.834,185.631
  Component Side w0.4: R101.1@199.374,168.193 ccw(c199.792,168.193) 199.496,167.898 200.074,167.32 cw(c199.428,166.674) R102.2@200.342,166.674
  Solder Side w0.3: v3@215.515,186.06 215.945,185.631 P101.4@217.839,185.631
  Solder Side w0.4: v2(199.846,167.564) 199.846,168.619 cw(c202.386,168.619) 200.59,170.415
  Solder Side w0.6: 200.59,170.415 ccw(c199.786,171.219) 200.923,171.219 200.923,171.732 ; 200.916,171.652 200.916,175.6 cw(c203.456,175.6) 201.66,177.396 210.116,185.853 cw(c210.641,185.328) 210.641,186.07 ; 210.577,186.054 v3(215.509,186.054)
LED_RING_DO: P101.2 P101.2_t R107.2 R108.2 | length 34.8
  Component Side w0.3: v3@215.542,184.281 215.892,184.631 P101.2_t@217.769,184.631
  Component Side w0.4: R107.2@205.683,163.359 206.691,163.359 206.695,163.356 ; 206.68,163.341 206.695,163.356 ; R108.2@207.009,163.042 206.695,163.356 ; v2(207.092,164.089) 207.092,163.753 206.695,163.356
  Solder Side w0.3: v3(215.522,184.229) 215.898,184.631 P101.2@217.775,184.631
  Solder Side w0.4: 204.886,169.622 204.945,169.563 ; v2@207.017,164.089 v2(207.092,164.089)
  Solder Side w0.5: 205.103,169.532 cw(c203.42,167.91) 205.757,167.91 ; 205.757,164.826 205.757,167.889 ; 205.786,164.881 ccw(c206.016,164.881) 205.854,164.718 206.052,164.52 ccw(c207.092,165.559) v2(207.092,164.089)
  Solder Side w0.6: 204.853,170.107 204.853,170.133 ; 205.103,169.532 cw(c205.873,170.204) 204.853,170.133 ; 210.228,182.191 211.522,183.485 cw(c213.318,181.689) 213.318,184.229 v3(215.522,184.229) ; 210.305,182.269 205.415,177.379 ccw(c206.771,176.023) 204.853,176.023 204.853,170.133
VCC_201: C203.2 R201.1 U201.3 | length 6
  Component Side w0.4: C203.2@196.477,160.493 U201.3@197.809,160.343
  Component Side w0.454: R201.1@192.075,162.025 ccw(c199.131,175.215) C203.2@196.449,160.499
VCC_202: C204.2 R202.1 U202.3 | length 6
  Component Side w0.4: C204.2@184.82,166.916 U202.3@185.898,166.12
  Component Side w0.454: R202.1@181.773,170.444 ccw(c194.479,178.339) C204.2@184.798,166.935
VCC_203: C205.2 R203.1 U203.3 | length 7
  Component Side w0.354: 177.05,182.3 cw(c176.041,180.989) 177.351,179.98
  Component Side w0.4: R203.1@176.987,182.868 177.05,182.3 ; C205.2@177.825,178.391 U203.3@178.7,176.385
  Component Side w0.454: 177.352,179.98 ccw(c191.902,183.453) C205.2@177.816,178.417
VCC_204: C206.2 R204.1 U204.3 | length 6
  Component Side w0.4: U204.3@177.443,189.966 C206.2@177.593,191.298
  Component Side w0.454: C206.2@177.599,191.326 cw(c192.315,188.644) R204.1@179.125,195.7